# Altium PCB XBeePCB.PcbDoc
Units mm, origin at the board's own origin, x right, y up, seen from the top; angles counter-clockwise.
Board outline 60 x 50.9 mm, 2 copper layers (Top Layer, Bottom Layer); 81 components, 69 nets, 247 pads, 0 vias.
Unrouted connection lines stored in the file: 171.
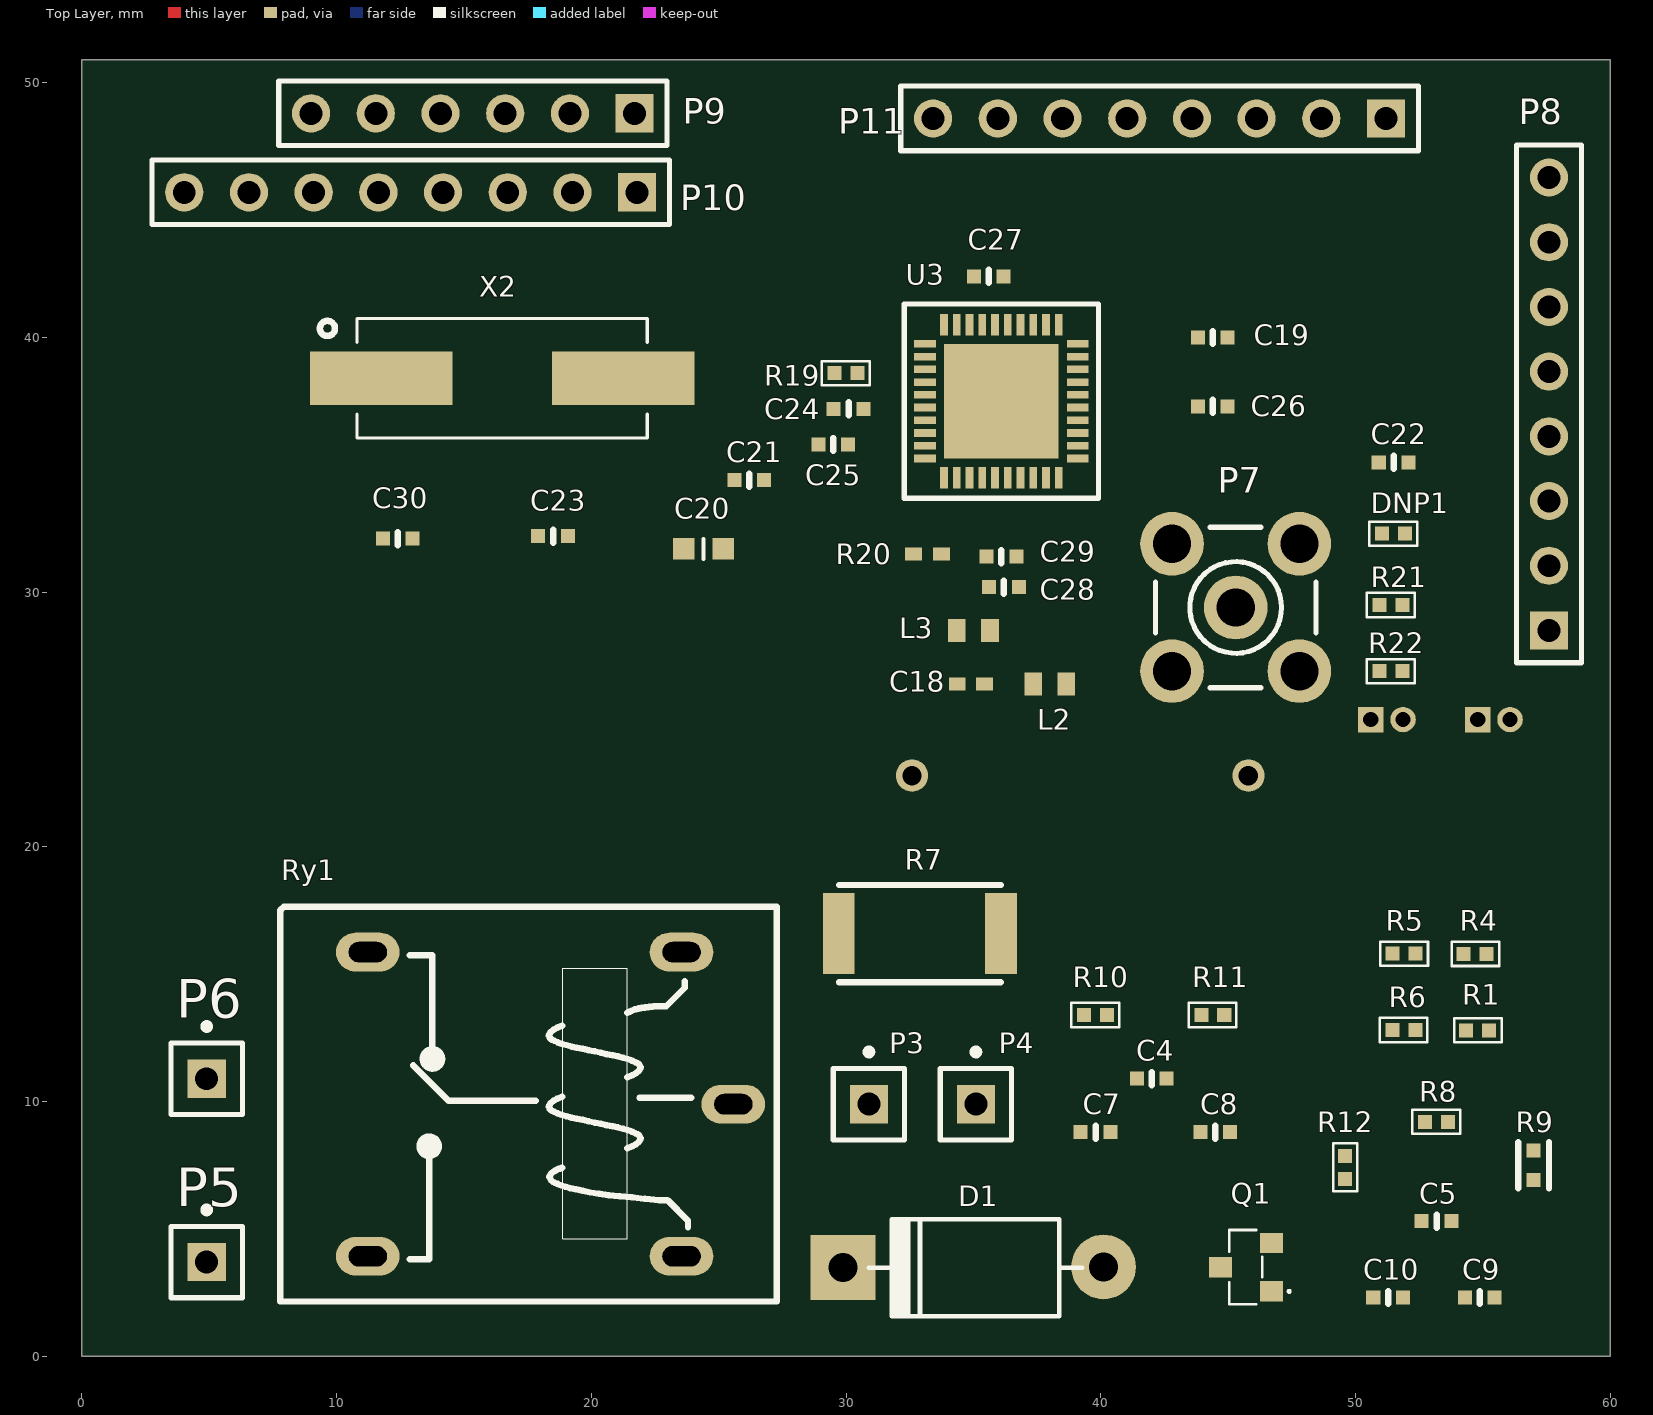
[diagram p0: Top Layer view]
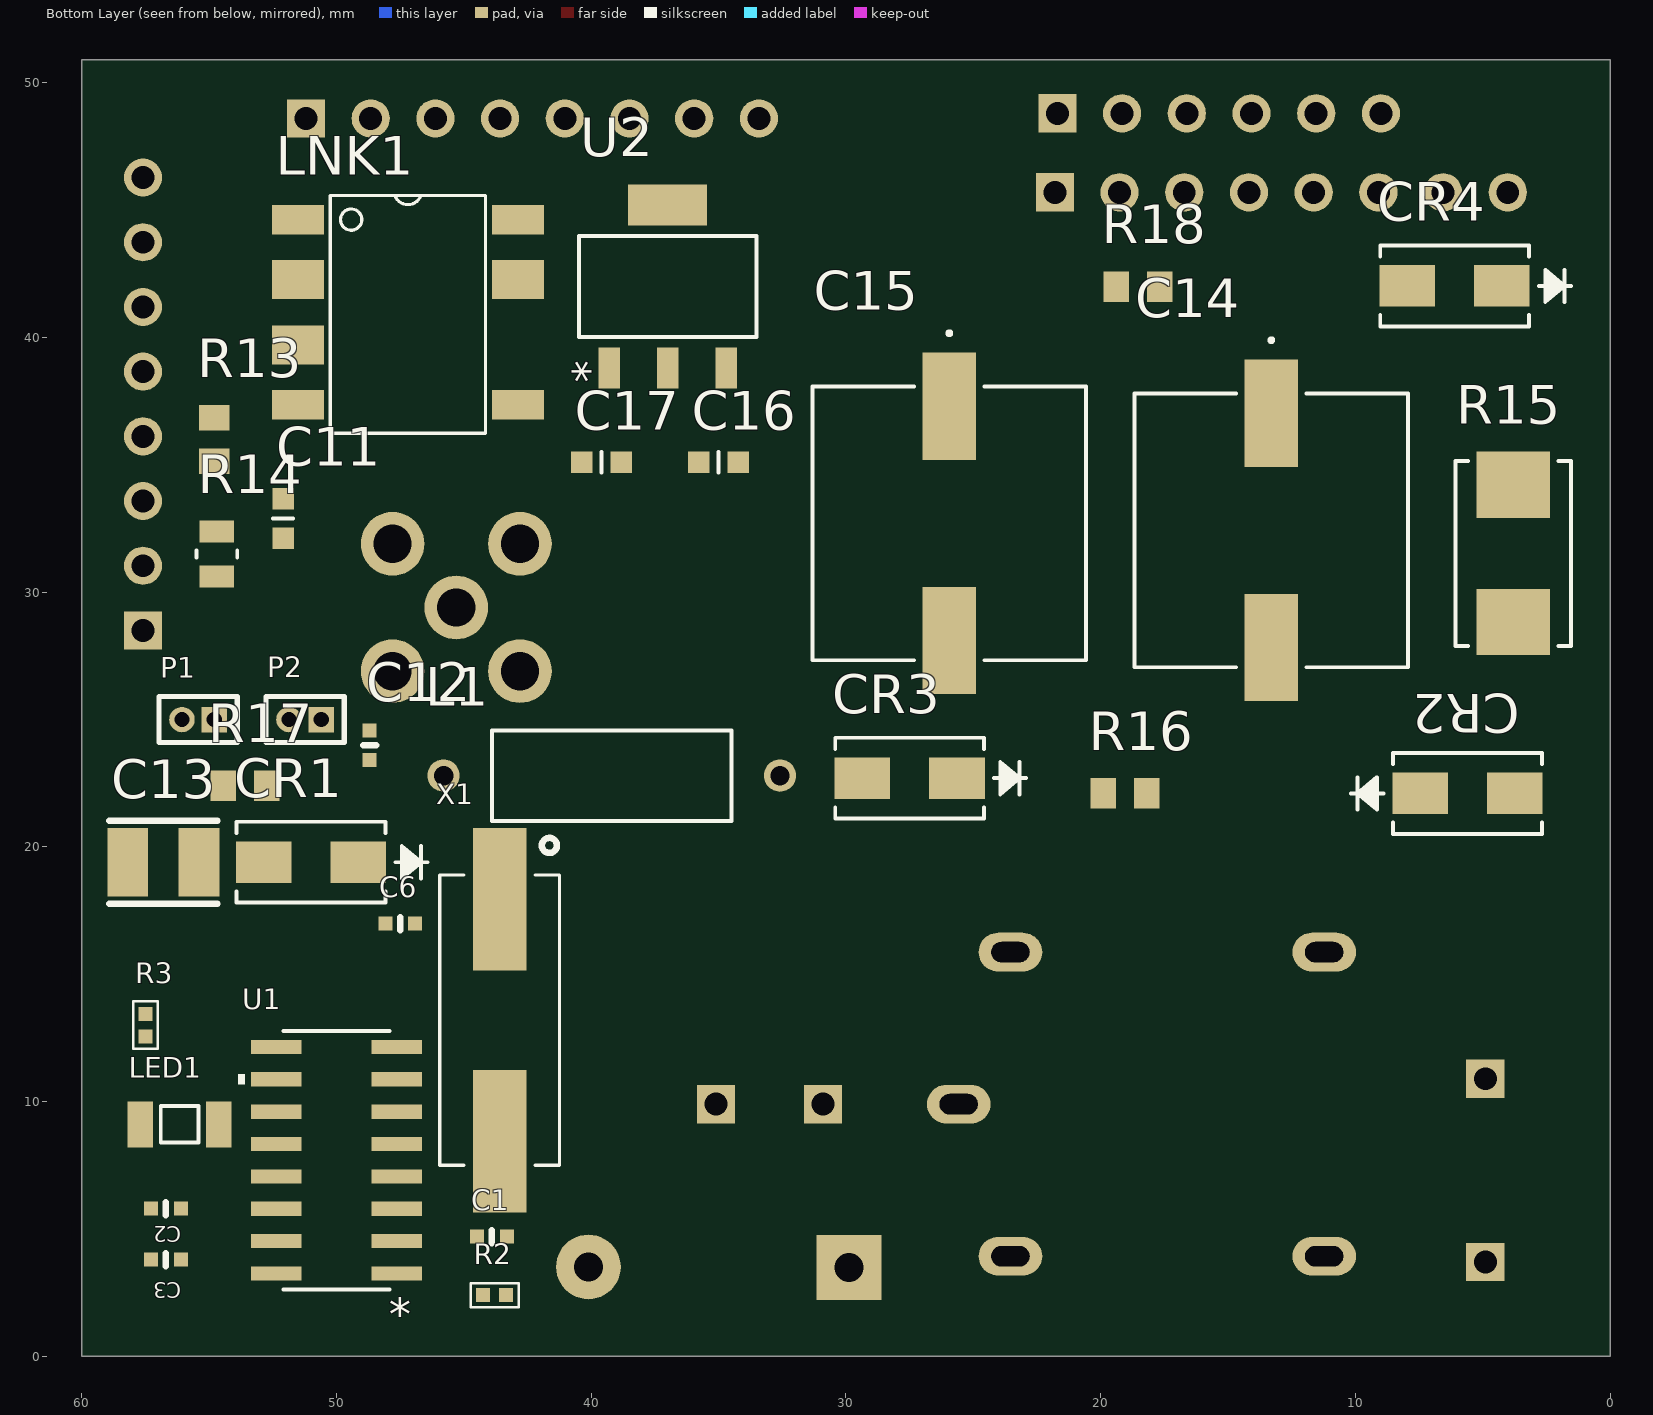
[diagram p1: Bottom Layer view, seen from below]

## Layer stack, top to bottom
Top Solder: solder mask 0.0102, Solder Resist, Dk 3.5
Top Layer: signal copper 0.0356
Dielectric 1: dielectric 0.32, FR-4, Dk 4.8
Bottom Layer: signal copper 0.0356
Bottom Solder: solder mask 0.0102, Solder Resist, Dk 3.5

## Board outline
0,0 60,0 60,6.1 60,50.9 59.9,50.9 0,50.9 0,44

## Design rules (kind name [scope] priority, off if disabled: settings)
Clearance [All] p1: gap=0.254
PolygonConnect [All] p1: connectstyle=Relief reliefconductorwidth=0.254 reliefentries=4 polygonreliefangle="90 Angle" airgapwidth=0.254
RoomDefinition PowerMngt [InComponentClass('PowerMngt')] p1: confinementstyle=ConfineIn formatcopy=TRUE lockcomponents=FALSE outline 0.8,48.437 60.4,48.437 60.4,17.294 0.8,17.294
RoomDefinition XBeeMain [InComponentClass('XBeeMain')] p2: confinementstyle=ConfineIn formatcopy=TRUE lockcomponents=FALSE outline 1.1,21.7 59.2,21.7 59.2,50.2 1.1,50.2
RoomDefinition PowerMeasurement [InComponentClass('PowerMeasurement')] p3: confinementstyle=ConfineIn formatcopy=TRUE lockcomponents=FALSE outline 1.468,0.61 59.5,0.61 59.5,37.91 1.468,37.91
RoutingVias [All] p1: holewidth=0.711 width=1.27 viastyle="Through Hole" minholewidth=0.711 minwidth=1.27 maxholewidth=0.711 maxwidth=1.27
SolderMaskExpansion [All] p1: expansion=0.102
Width [All] p1: maxlimit=0.254 minlimit=0.254 preferedwidth=0.254
30 further rules are at their usual default settings.

## Classes and differential pairs
component class PowerMeasurement: C1 C2 C3 C4 C5 C6 C7 C8 C9 C10 D1 LED1 P1 P2 P3 P4 P5 P6 Q1 R1 R2 R3 R4 R5 R6 R7 R8 R9 R10 R11 R12 Ry1 U1 X1
component class PowerMngt: C11 C12 C13 C14 C15 C16 C17 CR1 CR2 CR3 CR4 L1 LNK1 R13 R14 R15 R16 R17 R18 U2
component class XBeeMain: C18 C19 C20 C21 C22 C23 C24 C25 C26 C27 C28 C29 C30 DNP1 L2 L3 P7 P8 P9 P10 P11 R19 R20 R21 R22 U3 X2

## Components (designator, comment, footprint, x,y, rotation, side; value= is the part's Value field where it differs from the comment)
C1 "0.10µF" SMD-0402C 43.9,4.7 r90 bottom
C2 "0.10µF" SMD-0402C 56.7,5.8 r90 bottom
C3 "0.10µF" SMD-0402C 56.7,3.8 r90 bottom
C4 "0.022µF" SMD-0402C 42,10.9 r90 top
C5 "0.022µF" SMD-0402C 53.184,5.31 r270 top
C6 "0.10µF" SMD-0402C 47.5,16.99 r270 bottom
C7 "220pF" SMD-0402C 39.8,8.8 r90 top
C8 "220pF" SMD-0402C 44.5,8.8 r90 top
C9 "220pF" SMD-0402C 54.884,2.31 r270 top
C10 "220pF" SMD-0402C 51.284,2.31 r270 top
C11 "1µF" SMD-0603C 52.1,32.9 r180 bottom
C12 "0.10µF" SMD-0402C 48.705,23.994 r0 bottom
C13 "47µF" SMD-1210C 56.8,19.4 r180 bottom
C14 "4.7uF 400V" CAP_PAN_EEE_G17 13.305,32.426 r270 bottom
C15 "4.7uF 400V" CAP_PAN_EEE_G17 25.947,32.7 r270 bottom
C16 "10µF" SMD-0603C 35,35.1 r90 bottom
C17 "10µF" SMD-0603C 39.6,35.1 r270 bottom
C18 "47pF" CC0402N 34.9,26.4 r180 top
C19 "0.10µF" SMD-0402C 44.4,40 r90 top
C20 "10µF" SMD-0603C 24.4,31.7 r90 top
C21 "0.10µF" SMD-0402C 26.2,34.4 r270 top
C22 "0.10µF" SMD-0402C 51.5,35.1 r90 top
C23 "15pF" SMD-0402C 18.5,32.2 r90 top
C24 "0.10µF" SMD-0402C 30.1,37.2 r270 top
C25 "0.10µF" SMD-0402C 29.5,35.8 r270 top
C26 "0.10µF" SMD-0402C 44.4,37.3 r90 top
C27 "0.10µF" SMD-0402C 35.6,42.4 r270 top
C28 "47pF" SMD-0402C 36.2,30.2 r90 top
C29 "0.10µF" SMD-0402C 36.1,31.4 r90 top
C30 "15pF" SMD-0402C 12.4,32.1 r270 top
CR1 "S1M-13-F" SMA 51,19.4 r0 bottom
CR2 "S1M-13-F" SMA 5.6,22.1 r180 bottom
CR3 "US1J-13-F" SMA 27.5,22.7 r0 bottom
CR4 "S1M-13-F" SMA 6.105,42.026 r0 bottom
D1 "1N4007" D2A 35,3.5 r180 top
DNP1 "10K" "MCS 0402" 51.5,32.3 r180 top
L1 "1.5mH 130mA" AIAP-01 45.8,22.8 r0 bottom
L2 "5.1uH" INDC1005X45 38,26.4 r0 top
L3 "3.9nH" INDC1005X45 35,28.5 r180 top
LED1 "Blue LED SMD" "1206 Blue LED SMD" 56.2,9.1 r180 bottom
LNK1 "LNK302GN-TL" SMD-8B 47.2,40.9 r180 bottom
P1 "MHDR1X2" MHDR1X2 54.8,25 r0 bottom
P2 "MHDR1X2" MHDR1X2 50.6,25 r0 bottom
P3 "Plug" PIN1 30.9,9.9 r0 top
P4 "Plug" PIN1 35.1,9.9 r0 top
P5 "Plug" PIN1 4.9,3.7 r0 top
P6 "Plug" PIN1 4.9,10.9 r0 top
P7 "SMB" SMB_V-RJ45 45.3,29.4 r0 top
P8 "Header 8" HDR1X8 57.6,28.5 r90 top
P9 "Header 6" HDR1X6 21.7,48.8 r180 top
P10 "Header 8" HDR1X8 21.8,45.7 r180 top
P11 "Header 8" HDR1X8 51.2,48.6 r180 top
Q1 "S8050" SI2305TP 45.7,3.5 r90 top
R1 "422K" "MCS 0402" 54.8,12.8 r0 top
R2 "4K7" "MCS 0402" 43.8,2.4 r180 bottom
R3 "100R" "MCS 0402" 57.5,13 r90 bottom
R4 "422K" "MCS 0402" 54.7,15.8 r0 top
R5 "422K" "MCS 0402" 51.9,15.81 r0 top
R6 "422K" "MCS 0402" 51.9,12.81 r180 top
R7 "0.002" SMD-2512-RES 32.9,16.6 r180 top
R8 "1K" "MCS 0402" 53.184,9.21 r180 top
R9 "0.0" SMD-0402-RES 57,7.5 r180 top
R10 "1K" "MCS 0402" 39.8,13.4 r180 top
R11 "1K" "MCS 0402" 44.4,13.4 r180 top
R12 "1K" "MCS 0402" 49.6,7.41 r90 top
R13 "11K" RC0805N 54.8,36 r90 bottom
R14 "1K82" RES_ERA6A_0805 54.7,31.5 r270 bottom
R15 "8.2 2W" RES_SMF2_TYCO 3.805,31.526 r90 bottom
R16 "220R" RC0805N 19.047,22.1 r180 bottom
R17 "3K3" RC0805N 53.6,22.4 r0 bottom
R18 "220R" RC0805N 18.534,42 r180 bottom
R19 "10K" "MCS 0402" 30,38.6 r180 top
R20 "43K 1%" RC0402N 33.2,31.5 r0 top
R21 "10K" "MCS 0402" 51.4,29.5 r180 top
R22 "10K" "MCS 0402" 51.4,26.9 r180 top
Ry1 "Relay" SRD-05VDC-SL-C 18.4,9.9 r0 top
U1 "CS5490-ISZ" CIR-SOIC-16_W150 50,7.7 r0 bottom
U2 "LM1117-3.3V" MP04A 37,42 r90 bottom
U3 "JN5168/A02Z" QFN50P600X600X100-41N_JN5168/A02Z(PRIMARY) 36.1,37.5 r0 top
X1 "4.096MHZ" XTAL_ABLS2-4.096MHZ-D4Y-T 43.6,13.2 r270 bottom
X2 "4.096MHZ" XTAL_ABLS2-4.096MHZ-D4Y-T 16.5,38.4 r0 top

## Footprints (in the part's own frame and the unit in brackets; to place one, negate y for a bottom-side part, rotate by r counter-clockwise, add the part's x,y. Pads: shape width x height; smd on the part's side, far side on the other; paste and mask are expansions set on the pad)
"1206 Blue LED SMD" [mm] "Led SMD Blanco"
  rect 1x1.8 smd: 1(-1.5,0) 2(1.575,0)
  silkscreen extent -0.7,-0.7 0.77,0.72, body extent -1.47,-0.8 1.73,0.8, height 0.7
AIAP-01 [mil]
  round 50 hole 30 mask+0: 1(-520,0) 2(0,0)
  silkscreen extent -445,-70 -75,70, body extent 0,0 10,10, height 10
CAP_PAN_EEE_G17 [mil]
  rect 166x83 smd paste+0 mask+0: 1(-181,0) 2(181,0)
  silkscreen extent -297,-212 212,212, body extent 0,0 10,10, height 10
CC0402N [mil]
  rect 26x20 smd paste+0 mask+0: 1(-21,0) 2(21,0)
  body extent 0,0 10,10, height 10
CIR-SOIC-16_W150 [mil]
  rect 78x22 smd paste+0 mask+0: 1(-93,175) 2(-93,125) 3(-93,75) 4(-93,25) 5(-93,-25) 6(-93,-75) 7(-93,-125) 8(-93,-175) 9(93,-175) 10(93,-125) 11(93,-75) 12(93,-25) 13(93,25) 14(93,75) 15(93,125) 16(93,175)
  silkscreen extent -82,-200 152,200, body extent 0,0 10,10, height 10
D2A [mil] "Diode 2A, W 150mil, L 450mil"
  round 100 hole 45: 1(-201.3,-0.4)
  rect 100x100 hole 45: 2(201.49,0.59)
  silkscreen extent -169,-74 161,76, body extent -213,-53 217,48, height 100
HDR1X6 [mm] "Connector; Header; 6 Position"
  rect 1.5x1.5 hole 0.9: 1(0,0)
  round 1.5 hole 0.9: 2(2.54,0) 3(5.08,0) 4(7.62,0) 5(10.16,0) 6(12.7,0)
  silkscreen extent -1.27,-1.27 13.97,1.27
HDR1X8 [mm] "Connector; Header; 8 Position"
  rect 1.5x1.5 hole 0.9: 1(0,0)
  round 1.5 hole 0.9: 2(2.54,0) 3(5.08,0) 4(7.62,0) 5(10.16,0) 6(12.7,0) 7(15.24,0) 8(17.78,0)
  silkscreen extent -1.27,-1.27 19.05,1.27
INDC1005X45 [mm]
  rect 0.7x0.9 smd: 1(-0.65,0) 2(0.65,0)
"MCS 0402" [mm]
  rect 0.55x0.55 smd: 1(-0.45,0) 2(0.45,0)
  silkscreen extent -0.92,-0.48 0.95,0.48, body extent -0.5,-0.25 0.5,0.25, height 0.32
MHDR1X2 [mm] "Connector; Header; 2 Position"
  rect 1x1 hole 0.6: 1(0,0)
  round 1 hole 0.6: 2(1.27,0)
  silkscreen extent -0.9,-0.9 2.17,0.9
MP04A [mil]
  rect 63x33 smd paste+0 mask+0: 1(-126,90.55) 2(-126,0) 3(-126,-90.55)
  rect 63x122 smd paste+0 mask+0: 4(126,0)
  silkscreen extent -78,-137 78,137, body extent 0,0 10,10, height 10
PIN1 [mm] "Connector; Plug"
  rect 1.5x1.5 hole 0.9: 1(0,0)
  silkscreen extent -1.4,-1.4 1.4,2.17
QFN50P600X600X100-41N_JN5168/A02Z(PRIMARY) [mm]
  rect 0.85x0.3 smd: 1(-3,2.25) 2(-3,1.75) 3(-3,1.25) 4(-3,0.75) 5(-3,0.25) 6(-3,-0.25) 7(-3,-0.75) 8(-3,-1.25) 9(-3,-1.75) 10(-3,-2.25) 21(3,-2.25) 22(3,-1.75) 23(3,-1.25) 24(3,-0.75) 25(3,-0.25) 26(3,0.25) 27(3,0.75) 28(3,1.25) 29(3,1.75) 30(3,2.25)
  rect 0.3x0.85 smd: 11(-2.25,-3) 12(-1.75,-3) 13(-1.25,-3) 14(-0.75,-3) 15(-0.25,-3) 16(0.25,-3) 17(0.75,-3) 18(1.25,-3) 19(1.75,-3) 20(2.25,-3) 31(2.25,3) 32(1.75,3) 33(1.25,3) 34(0.75,3) 35(0.25,3) 36(-0.25,3) 37(-0.75,3) 38(-1.25,3) 39(-1.75,3) 40(-2.25,3)
  rect 4.5x4.5 smd: EXP(0,0)
  silkscreen extent -3.81,-3.81 3.81,3.81
RC0402N [mm]
  rect 0.656x0.5 smd paste+0 mask+0: 1(-0.553,0) 2(0.553,0)
  body extent 0,0 0.25,0.25, height 0.25
RC0805N [mm]
  rect 1.006x1.2 smd paste+0 mask+0: 1(-0.853,0) 2(0.853,0)
  body extent 0,0 0.25,0.25, height 0.25
RES_ERA6A_0805 [mil]
  rect 34x53 smd paste+0 mask+0: 1(-34.5,0) 2(34.5,0)
  silkscreen extent -5,-32 5,32, body extent 0,0 10,10, height 10
RES_SMF2_TYCO [mil]
  rect 102.5x114 smd paste+0 mask+0: 1(-106.25,0) 2(106.25,0)
  silkscreen extent -143,-90 143,90, body extent 0,0 10,10, height 10
SI2305TP [mm]
  rect 0.8x0.9 smd: 1(-0.95,-1) 2(0.95,-1) 3(0,1)
  silkscreen extent -1.46,-1.75 1.46,0.65
SMA [mm]
  rect 2.18x1.63 smd paste+0 mask+0: 1(-1.857,0) 2(1.857,0)
  silkscreen extent -4.57,-1.59 2.92,1.59, body extent 0,0 0.25,0.25, height 0.25
SMB_V-RJ45 [mm] "Connector; SMB Straight"
  round 2.5 hole 1.5: 1(0,0) 2(-2.5,-2.5) 2(-2.5,2.5) 2(2.5,-2.5) 2(2.5,2.5)
  silkscreen extent -3.15,-3.15 3.15,3.15
SMD-8B [mil]
  rect 80x60 smd: BP(-170,-47) S2(-170,54) S3(170,54)
  rect 80x46 smd: D(170,-139.25) FB(-170,-139.25) S1(-170,146.75) S4(170,146.75)
  silkscreen extent -120,-184 120,184
SMD-0402-RES [mm]
  rect 0.55x0.55 smd: 1(0,0.584) 2(0,-0.584)
  silkscreen extent -0.6,-0.9 0.6,0.9, body extent -0.28,-0.57 0.27,0.58, height 0.41
SMD-0402C [mm]
  rect 0.55x0.55 smd: 1(0,0.584) 2(0,-0.584)
  silkscreen extent -0.25,0 0.25,0, body extent -0.25,-0.51 0.25,0.51, height 0.51
SMD-0603C [mm]
  rect 0.85x0.85 smd: 1(0,0.775) 2(0,-0.775)
  silkscreen extent -0.4,0 0.4,0, body extent -0.4,-0.8 0.4,0.8, height 0.9
SMD-1210C [mm]
  rect 1.6x2.7 smd: 1(-1.4,0) 2(1.4,0)
  silkscreen extent -2.12,-1.63 2.12,1.63, body extent -2,-1.22 2,1.27, height 1.7
SMD-2512-RES [mil]
  rect 49x125 smd: 1(-125.5,0) 2(125.5,0)
  silkscreen extent -125,-75 125,75, body extent -125,-59 125,59, height 63
SRD-05VDC-SL-C [mil] "Relevador compacto de 1 polo, 2 tiros (SPDT) y bobina de 5 Vcc"
  oval 98.43x60 hole 31.5 slot 59.06 at 0 deg: 1(202.5,-235) 2(202.5,235) 3(-282.5,235) 4(282.5,0) 5(-282.5,-235)
  silkscreen extent -418,-305 350,305, body extent -418,-305 338,301, height 591
XTAL_ABLS2-4.096MHZ-D4Y-T [mm]
  rect 5.6x2.1 smd: 1(-4.75,0) 2(4.75,0)
  silkscreen extent -7.15,-2.35 5.7,2.35

## Part data
C1 C2 C3 C6 C12 C19 C21 C22 C24 C25 C26 C27 C29: library part GCM155R71C104KA55D, "CAP CER 0.1UF 16V X7R 0402"
C4 C5: library part GCM155R71H223KA55D, "CAP CER 0.022UF 50V X7R 0402"
C7 C8 C9 C10: library part GCM1555C1H221JA16D, "CAP CER 220PF 50V NP0 0402"
C11: library part GRM188R61C105MA12D, "CAP CER 1UF 16V X5R 0603"
C13: library part GRM32EC81C476KE15L, "CAP CER 47UF 16V X6S 1210"
C14 C15: library part EEV-EB2G4R7Q, "Imported"
C16 C17 C20: library part GRM188R60J106KE47D, "CAP CER 10UF 6.3V X5R 0603"
C18: library part CC0402JRNPO9BN47, "Imported"
C23 C30: library part GJM1555C1H150FB01D, "CAP CER 15PF 50V NP0 0402"
C28: library part GCM1555C1H470JA16D, "CAP CER 47PF 50V NP0 0402"
CR1 CR2 CR3 CR4 U1: "Imported"
D1: "Diode 1A"
DNP1 R19 R21 R22: library part "10K Res", "Res Thin Film 0402 10K Ohm 0.5% 0.063W(1/16W) ±25ppm/C Molded SMD Automotive Punched T/R"
L1: library part AIAP-01-152K-T, "Imported"
L2: library part LQP15MN5N1B02D, "Inductor RF Chip Unshielded Thin Film 5.1nH 0.1nH 500MHz 13Q-Factor Ceramic 140mA 700mOhm DCR 0402 T/R"
L3: library part LQP15MN3N9B02D, "FIXED IND 3.9NH 170MA 500 MOHM"
LNK1: "IC OFFLINE SWIT OCP 8SMD"
P1 P2: "Header, 2-Pin"
P7: "SMB Straight Connector"
P8 P10 P11: "Header, 8-Pin"
P9: "Header, 6-Pin"
Q1: library part MMSS8050-H-TP, "TRANS NPN 25V 1.5A SOT23"
R1 R4 R5 R6: "RESISTOR, THICK FILM, 422KOHM, 100mW, ± 1%"
R2: library part "4K7 Res", "Panasonic ERA Series Thin Film Surface Mount Resistor 0402 Case 4.7k 0.1% 0.063W 25ppm/C"
R3: "Res Thin Film 0402 100 Ohm 0.5% 0.063W(1/16W) ±25ppm/C Molded SMD Automotive Punched T/R"
R7: library part ERJ-MP4PF2M0U, "RES SMD 0.002 OHM 1% 2W 2512"
R8 R10 R11 R12: library part "1K Res", "RES SMD 1K OHM 5% 1/32W 01005"
R9: library part ERJ-2GE0R00X, "RES SMD 0.0OHM JUMPER 1/10W 0402"
R13: library part ERA-6AEB113V, "Imported"
R14: library part ERA-6AEB1821V, "Imported"
R15: library part SMW28R2JT, "Imported"
R16 R18: library part ERJ-P06J221V, "Imported"
R17: library part ERA-6AEB332V, "Imported"
R20: library part "Res 43K", "Imported"
Ry1: library part SRD-05VDC-SL-C, "Songle Relay"
U2: library part LM1117MPX-3.3/NO, "Imported"
U3: "JN5168 - ZigBee, RF4CE, JenNet-IP and IEEE802.15.4 wireless microcontroller with 256 kB Flash, 32 kB RAM"
X1 X2: library part ABLS2-4.096MHZ-D4Y-T, "4.096MHz ±30ppm Crystal 18pF 180 Ohm -40°C ~ 85°C  Surface Mount HC49/US"

## Nets (pads, with @x,y where several pads share a name; then routed paths per layer and width w, separated by ;. In a path a pad name is that pad's centre, name@x,y a point inside that pad or via, vN(x,y) a via of type N, cw(c..) or ccw(c..) an arc to the next point about the centre after c; other vN are vias at no path point)
3V3: C2.2 C17.2 C19.1 C20.2 C21.1 C22.1 P8.7 P8.8 P9.1 P10.1 P11.1 R2.2 R3.2 R21.2 R22.2 U1.11 U1.15 U2.2 U2.4 U3.9 U3.30
12V: C13.1 C16.2 CR1.2 L1.2 R17.1 U2.3
230V: P5.1 R15.2 Ry1.5
ADC1: P10.3 U3.15
ADC2: P10.4 U3.11
DIO1: P10.8 U3.17
DIO2: P10.7 U3.18
DIO4: P9.3 U3.26
DIO5: DNP1.2 P9.4 U3.27
DIO6: P9.5 U3.28
DIO7: P9.6 U3.29
DIO8: P11.3 U3.31
DIO9: P11.4 U3.32
DIO10: P11.5 U3.33
DIO11: P11.6 U3.34
DIO12: P11.7 U3.36
DIO13: P11.8 U3.37
DIO16: P10.5 U3.1
DIO17: P10.6 U3.2
DIO18: P8.5 U3.23
DIO19: P8.1 R22.1 U3.24
DO0: P8.6 U3.20
DO1: P8.2 U3.22
GND: C1.2 C2.1 C3.1 C7.2 C8.1 C9.2 C10.1 C13.2 C15.1 C16.1 C17.1 C19.2 C20.1 C21.2 C22.2 C23.1 C24.2 C25.2 C26.2 C27.2 C28.2 C29.2 C30.1 CR3.2 P7.2 P8.4 P9.2 P10.2 P11.2 Q1.2 R8.1 R12.2 R17.2 R18.1 R20.2 U1.10 U2.1 U3.21 U3.39 U3.EXP
IIN+: C4.1 C7.1 R10.1 U1.5
IIN-: C4.2 C8.2 R11.1 U1.4
NetC3_2: C3.2 U1.16
NetC6_1: C6.1 U1.8
NetC6_2: C6.2 U1.9
NetC11_1: C11.1 CR1.1 R13.1
NetC11_2: C11.2 C12.2 CR3.1 L1.1 LNK1.S1 LNK1.S2 LNK1.S3 LNK1.S4 R14.2
NetC12_1: C12.1 LNK1.BP
NetC14_1: C14.1 CR4.2 R18.2
NetC14_2: C14.2 CR2.1 R16.2
NetC15_2: C15.2 LNK1.D R16.1
NetC18_1: C18.1 L2.1
NetC18_2: C18.2 L3.2 U3.13
NetCR2_2: CR2.2 R15.1
NetD1_1: D1.1 Q1.3 Ry1.2
NetD1_2: D1.2 Ry1.1
NetL2_2: L2.2 P7.1
NetLED1_1: LED1.1 R3.1
NetLED1_2: LED1.2 U1.12
NetLNK1_FB: LNK1.FB R13.2 R14.1
NetP4_1: P4.1 R7.2 R10.2
NetR1_1: R1.1 R4.2
NetR4_1: R4.1 R5.2
NetR5_1: R5.1 R6.2
NetR6_1: R6.1 R8.2 R9.2
NetR19_1: R19.1 U3.3
NetR20_1: R20.1 U3.10
NetU1_1: U1.1 X1.2
NetU1_2: U1.2 X1.1
NEUTRAL: CR4.1 P6.1 R1.2 R7.1 R11.2
P1: P3.1 Ry1.4
RELAY: Q1.1 U3.16
RESET: C1.1 R2.1 U1.3 U3.19
RX: U1.14 U3.38
TX: U1.13 U3.40
VB_DIG: C27.1 U3.35
VB_RAM: C26.1 U3.25
VB_RF: C28.1 C29.1 L3.1 U3.12 U3.14
VB_SYNTH: C24.1 U3.6
VB_VCO: C25.1 U3.8
VIN+: C5.1 C9.1 R9.1 U1.6
VIN-: C5.2 C10.2 R12.1 U1.7
W\P\: DNP1.1 P8.3 R21.1
XTAL_IN: C30.2 U3.5 X2.1
XTAL_OUT: C23.2 U3.4 X2.2
pads on no net: P1.1 P1.2 P2.1 P2.2 R19.2 Ry1.3 U3.7

## Text inside footprints (layer, text, board x,y; h text height)
LED1: Mechanical 1 "+" at 57.851,10.243 h0.25 r180
U1: Mechanical 13 "*" at 48.108,4.093 h1.27 r180; Bottom Overlay "*" at 47.066,2.823 h1.27 r180
U2: Mechanical 13 "*" at 38.957,40.082 h1.27 r270; Bottom Overlay "*" at 39.465,38.228 h1.27 r270